# EAGLE board Arduino_Nano_33_IOT_Header_Traces (EAGLE 9.7.0)
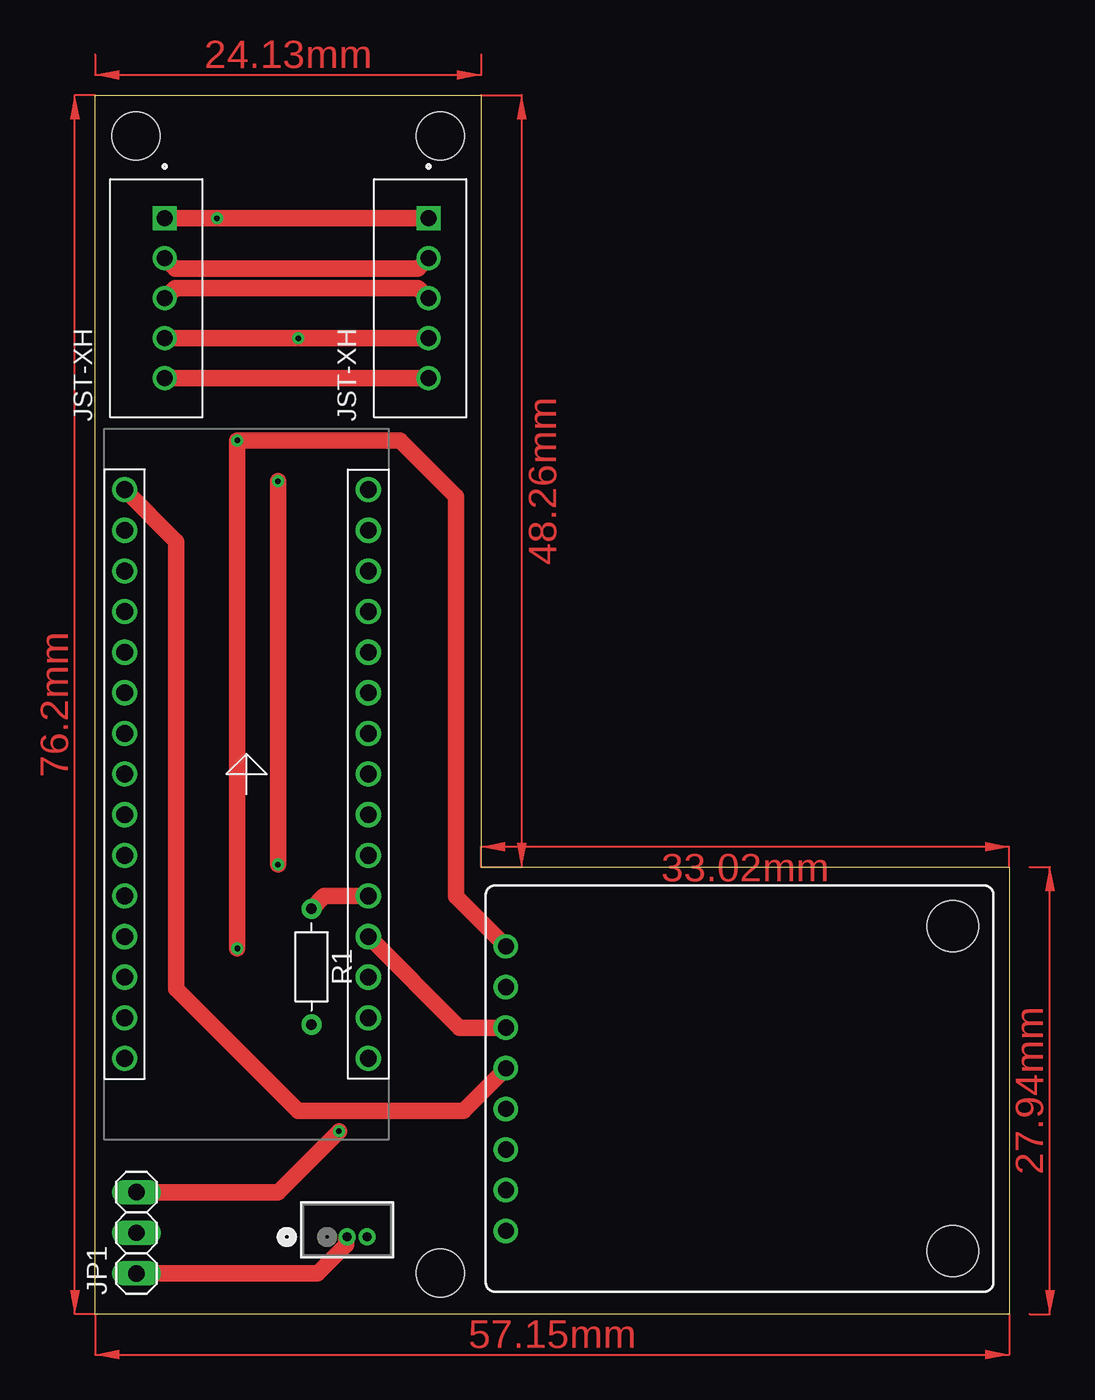
[diagram p0: board, top side]
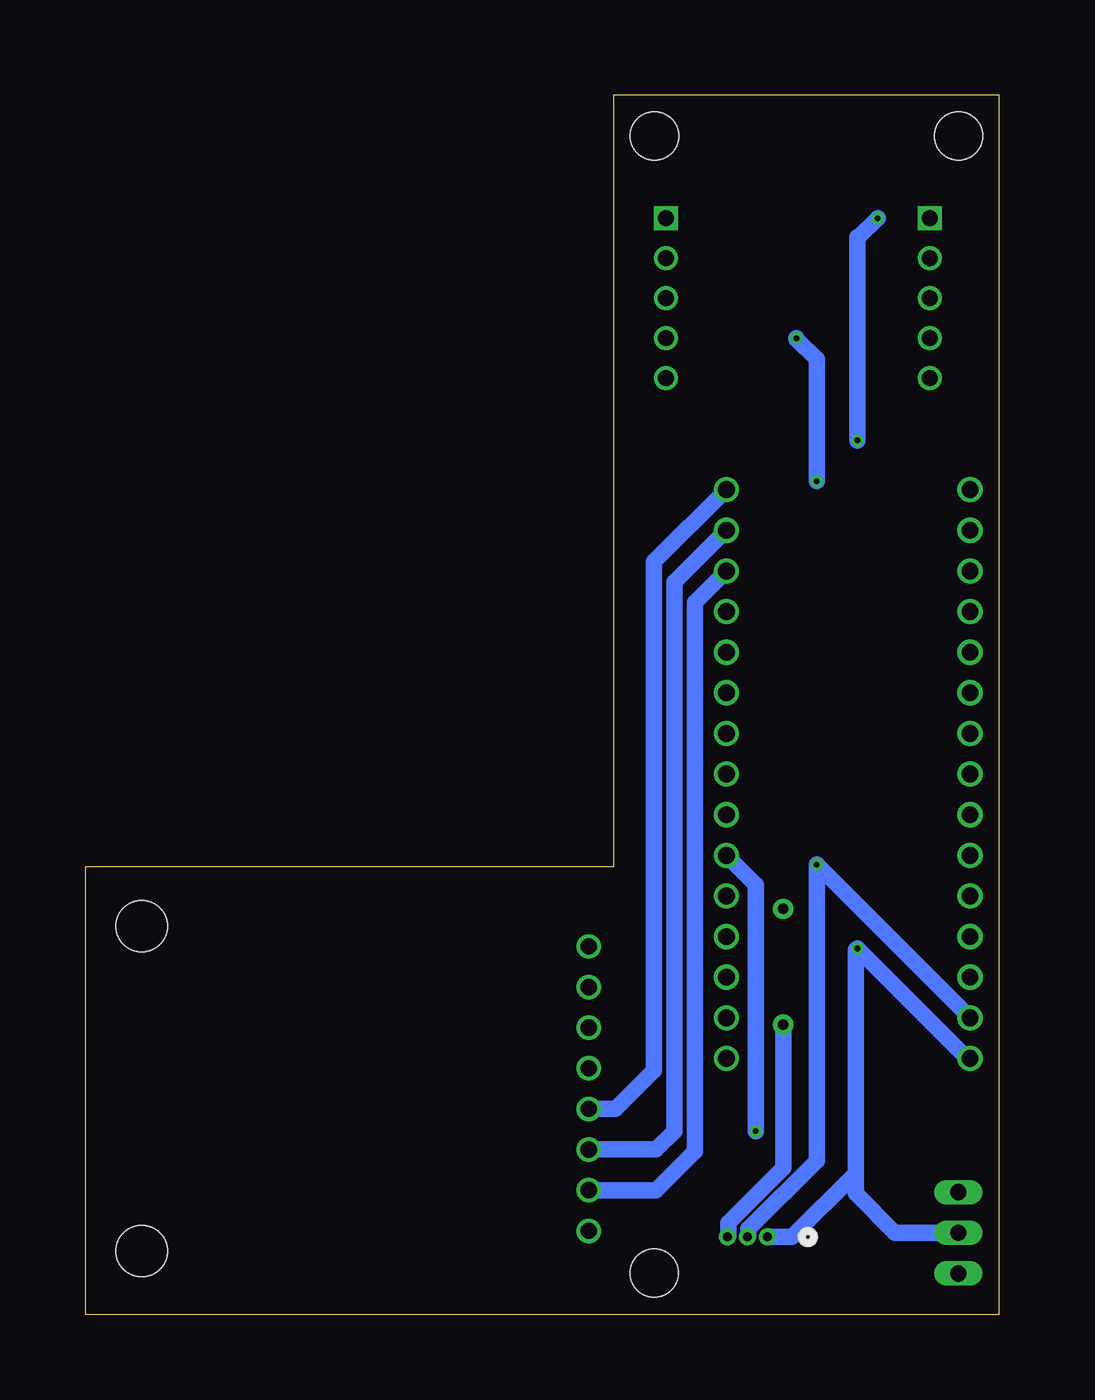
[diagram p1: board, bottom side, seen from below]

Size 57.15 x 76.2 mm. Coordinates in mm from the lower left corner, seen from the top.
Outline: 57.15,0 0,0 0,76.2 24.13,76.2 24.13,27.94 57.15,27.94 57.15,0
Copper layers (1*16): Top 0.035mm / dielectric 1.5mm / Bottom 0.035mm
Design rules "Fusion Electronics Design Rules": minimum track width 6mil, minimum drill 0.35mm, track to track 6mil, track to pad 6mil, pad to pad 6mil, via to via 6mil, smd to smd 6mil, copper to edge 40mil, drill to drill 6mil, minimum pad ring 10mil, minimum via ring 8mil, stop-mask expansion 4mil, vias tented up to drill 0mil, thermal gap 10mil
Holes 3 mm at 21.58,73.65 21.59,2.55 2.55,73.65

## Footprints (pad centres in the part's own frame; a part is rotated, then mirrored left to right if it is on the bottom)
JST_B5B-XH-A = drill 1 square: 1 5,-0.525 | drill 1: 2 2.5,-0.525; 3 0,-0.525; 4 -2.5,-0.525; 5 -5,-0.525
PICOBLADE_1.25_3-PIN = drill 0.559 pad 1.067: 1 0,0; 2 -1.25,0; 3 -2.5,0
1X03 = drill 1.016 long: 1 -2.54,0; 2 0,0; 3 2.54,0
5V_MICRO-SD_BREAKOUT+_HEADERS = drill 1.02: 3V 30.48,-19.05; 5V 30.48,-21.59; CD 30.48,-3.81; CLK 30.48,-13.97; CS 30.48,-6.35; DI 30.48,-8.89; DO 30.48,-11.43; GND 30.48,-16.51 | hole 3.2: 2.54,-22.86; 2.54,-2.54
RESAD724W46L381D178B = drill 0.66 pad 1.26: 1 -3.62,0; 2 3.62,0
NANO_33_IOT_HEADER = drill 1.05: +3V3 -7.62,15.24; +5V -7.62,-10.16; A0 -7.62,10.16; A1 -7.62,7.62; A2 -7.62,5.08; A3 -7.62,2.54; A4 -7.62,0; A5 -7.62,-2.54; A6 -7.62,-5.08; A7 -7.62,-7.62; AREF -7.62,12.7; D2 7.62,-7.62; D3 7.62,-5.08; D4 7.62,-2.54; D5 7.62,0; D6 7.62,2.54; D7 7.62,5.08; D8 7.62,7.62; D9 7.62,10.16; D10 7.62,12.7; D11 7.62,15.24; D12 7.62,17.78; D13 -7.62,17.78; GND1 -7.62,-15.24; GND2 7.62,-10.16; RST1 -7.62,-12.7; RST2 7.62,-12.7; RXO 7.62,-15.24; TXI 7.62,-17.78; VIN -7.62,-17.78

## Placement (x,y rotation side)
HEADER2PCB  B5B-XH-A  [JST_B5B-XH-A]  20.32,63.5 90 top
J1  PICOBLADE_1.25_3-PINCONN03_530470310_MOL  [PICOBLADE_1.25_3-PIN]  14.51,4.82 180 top
JP1  PINHD-1X3  [1X03]  2.58,5.08 90 top
MICROSD_HEADER  MICROSDCARDBREAKOUTBOARD+HEADER  [5V_MICRO-SD_BREAKOUT+_HEADERS]  56.17,1.39 180 top
R1  470  [RESAD724W46L381D178B]  13.53,21.71 270 top
U$2  ARDUINO_NANOHEADERS  [NANO_33_IOT_HEADER]  9.46,33.76 0 top
USBCONNECT  B5B-XH-A  [JST_B5B-XH-A]  3.82,63.5 90 top

## Library data of the parts
HEADER2PCB USBCONNECT = Custom Library; MANUFACTURER: JST; MAXIMUM_PACKAGE_HEIGHT: 7.00 mm; MPN: 3; PARTREV: 7/4/21; STANDARD: Manufacturer Recommendations
J1 = Custom Library; COPYRIGHT: Copyright (C) 2025 Ultra Librarian. All rights reserved.; DATASHEET: https://www.molex.com/en-us/products/part-detail-pdf/530470310?display=pdf; DESCRIPTION: 1.25mm Pitch, PicoBlade PCB Header, Single Row, Vertical, Through Hole, Tin Plating, Friction Lock, 3 Circuits, Tray, 2.30mm PC Tail Length; MANUFACTURER: Molex; MANUFACTURER_NAME: Molex Connector Corporation; MANUFACTURER_PART_NUMBER: 530470310; MPN: 530470310
JP1 = Connector; CATEGORY: Headers; DESCRIPTION: Header-Straight-3 Position; PACKAGE_TYPE: THT; PITCH: 0.100" (2.54mm); SUBCATEGORY: Headers-Male Pins; TYPE: Board to Board or Cable-Unshrouded-Through Hole-Straight
MICROSD_HEADER U$2 = Pre-Built Boards
R1 = Tinkercad; CATEGORY: Resistor; SUB-CATEGORY: Fixed

## Nets
CHIP_SELECT: MICROSD_HEADER.CS U$2.D10
CLK: MICROSD_HEADER.CLK U$2.D13
GND: HEADER2PCB.4 J1.2 JP1.1 U$2.GND1 USBCONNECT.4
N$1: R1.1 U$2.D2
PWR: HEADER2PCB.1 J1.1 JP1.2 MICROSD_HEADER.5V U$2.VIN USBCONNECT.1
RGB_DATA: J1.3 R1.2
SD_DATA_IN: MICROSD_HEADER.DI U$2.D11
SD_DATA_OUT: MICROSD_HEADER.DO U$2.D12
SD_GND: MICROSD_HEADER.GND U$2.GND2
SHD: HEADER2PCB.5 USBCONNECT.5
SIGNAL: JP1.3 U$2.D3
USB_DATA_N: HEADER2PCB.2 USBCONNECT.2
USB_DATA_P: HEADER2PCB.3 USBCONNECT.3

## Tracks (layer width: path | path; a pad name or v marks a point on that pad's centre or on a via)
CHIP_SELECT
  Bottom 1.016: U$2.D10 19.05,44.49 19.05,10.16 21.47,7.74 MICROSD_HEADER.CS
CLK
  Top 1.016: U$2.D13 5.08,48.3 5.08,20.32 12.7,12.7 23.02,12.7 MICROSD_HEADER.CLK
GND  (via drill 0.35)
  Top 1.016: USBCONNECT.4 v12.7,61 HEADER2PCB.4 | v11.43,28.11 v11.43,52.07 | JP1.1 13.91,2.54 15.7,4.33 15.7,4.77 J1.2
  Bottom 1.016: v12.7,61 12.7,60.96 11.43,59.69 v11.43,52.07 | U$2.GND1 v11.43,28.11 11.43,9.59 15.7,5.32 15.7,4.88 J1.2
N$1
  Top 1.016: R1.1 14.33,26.14 U$2.D2
PWR  (via drill 0.35)
  Top 1.016: USBCONNECT.1 v7.62,68.5 HEADER2PCB.1 | v8.89,22.86 v8.89,54.61 19.05,54.61 22.57,51.09 22.57,26.1 MICROSD_HEADER.5V
  Bottom 1.016: v7.62,68.5 8.81,67.31 8.89,67.31 v8.89,54.61 | U$2.VIN 2.01,15.98 v8.89,22.86 8.99,22.76 8.99,8.81 | 8.99,8.81 12.98,4.82 J1.1 | 8.99,8.81 8.99,7.54 6.53,5.08 JP1.2
RGB_DATA
  Bottom 1.016: J1.3 16.95,4.88 16.95,5.72 13.53,9.14 R1.2
SD_DATA_IN
  Bottom 1.016: U$2.D11 20.32,45.76 20.32,11.43 21.47,10.28 MICROSD_HEADER.DI
SD_DATA_OUT
  Bottom 1.016: U$2.D12 21.59,47.03 21.59,15.24 24.01,12.82 MICROSD_HEADER.DO
SD_GND
  Top 1.016: MICROSD_HEADER.GND 22.77,17.9 U$2.GND2
SHD
  Top 1.016: USBCONNECT.5 HEADER2PCB.5
SIGNAL  (via drill 0.35)
  Top 1.016: v15.24,11.43 11.43,7.62 JP1.3
  Bottom 1.016: U$2.D3 15.24,26.84 v15.24,11.43
USB_DATA_N
  Top 1.016: USBCONNECT.2 4.99,65.36 20.21,65.36 HEADER2PCB.2
USB_DATA_P
  Top 1.016: USBCONNECT.3 4.99,64.14 20.21,64.14 HEADER2PCB.3
(copper drawn outside any net)
  shapes: Top area x6